# Altium PCB V1.PcbDoc
Units mm, origin at the board's own origin, x right, y up, seen from the top; angles counter-clockwise.
Board outline 50 x 55 mm, 2 copper layers (Top Layer, Bottom Layer); 56 components, 45 nets, 228 pads, 89 vias.
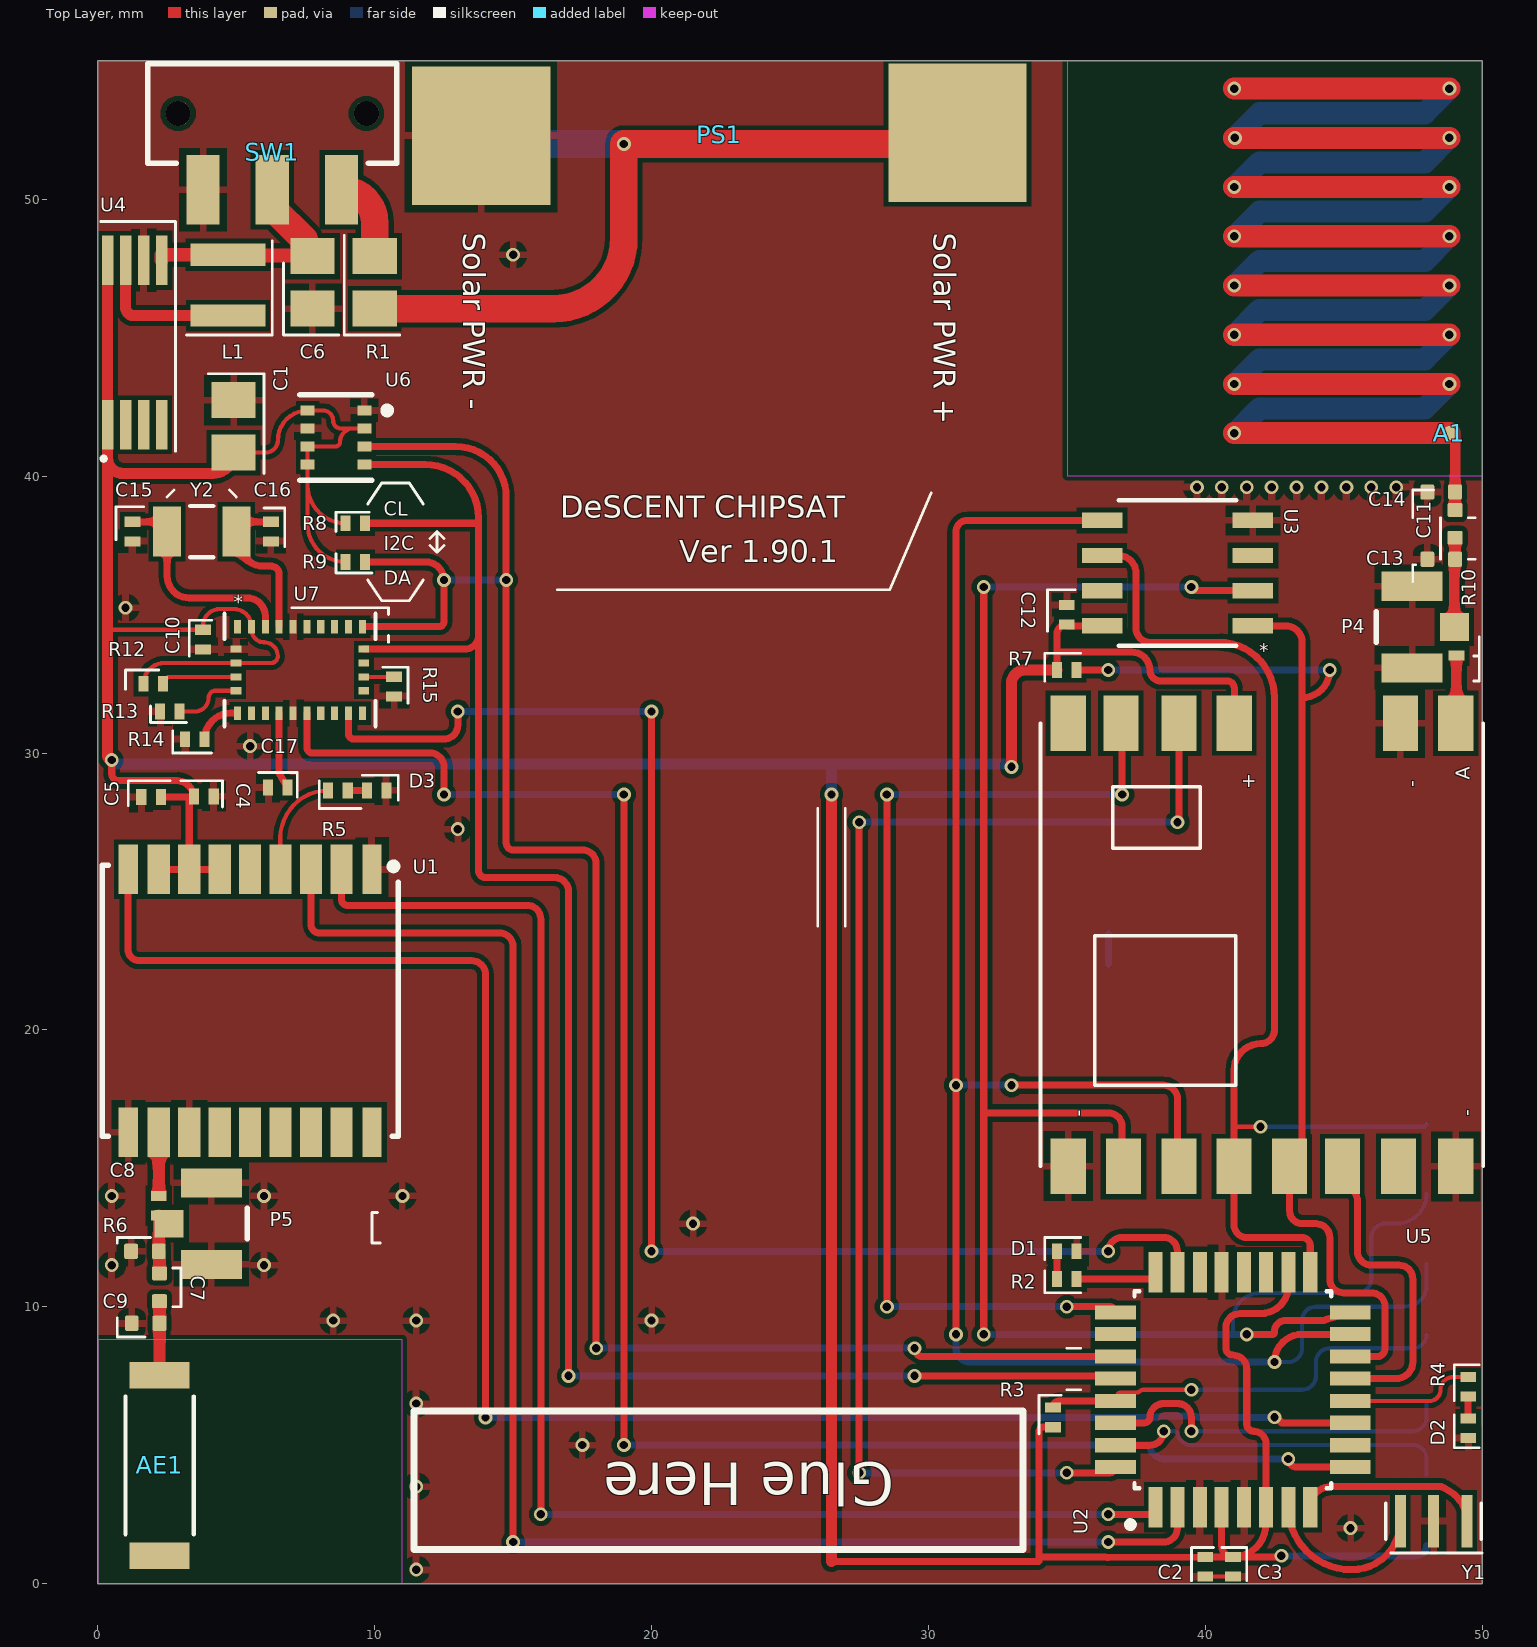
[diagram p0: Top Layer view]
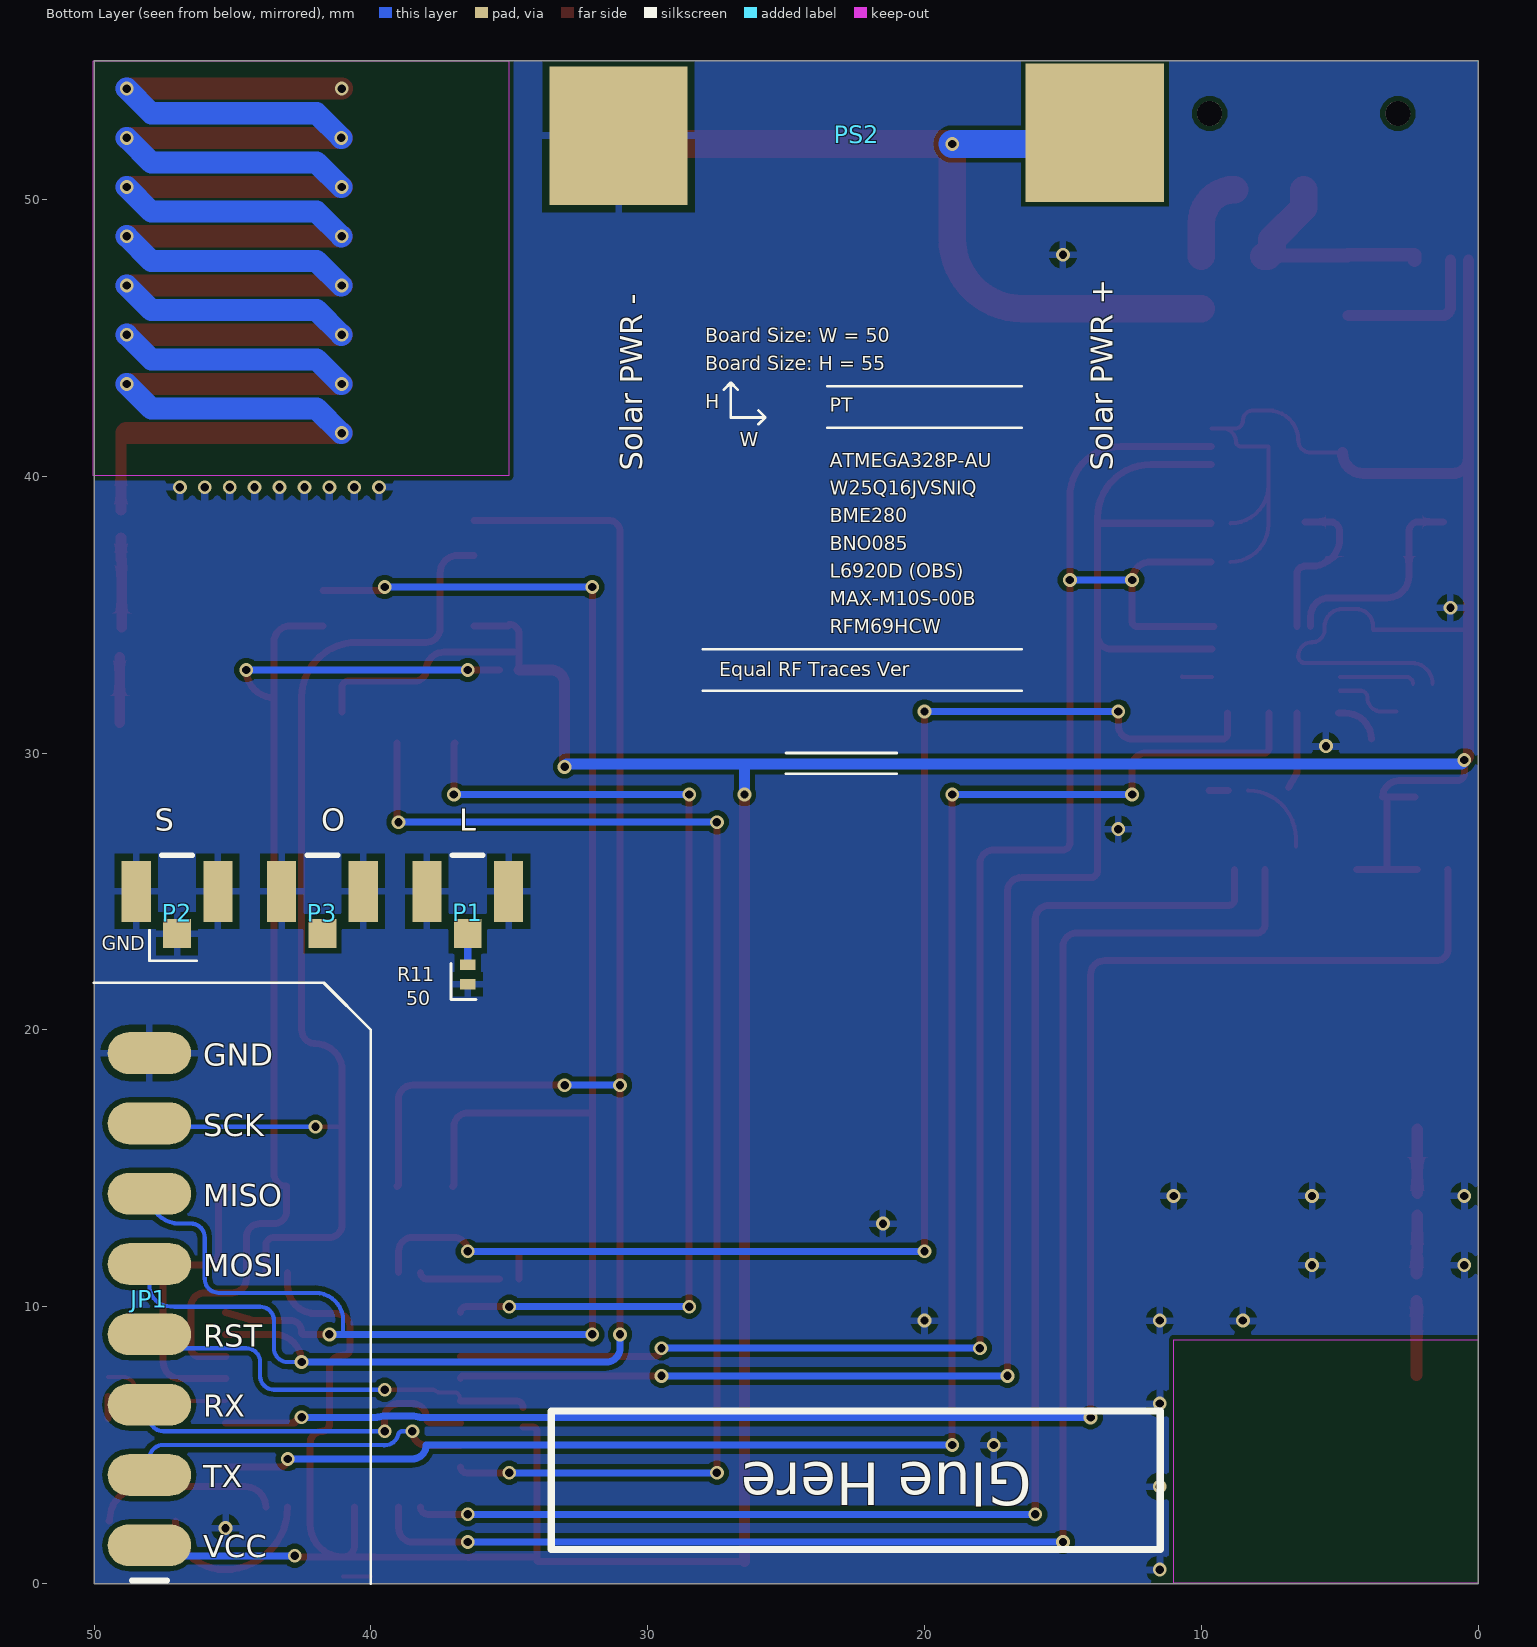
[diagram p1: Bottom Layer view, seen from below]

## Layer stack, top to bottom
Top Solder: solder mask 0.0102, Solder Resist, Dk 3.5
Top Layer: signal copper 0.0356
Dielectric 1: dielectric 0.32, FR-4, Dk 4.8
Bottom Layer: signal copper 0.0356
Bottom Solder: solder mask 0.0102, Solder Resist, Dk 3.5

## Board outline
0,0 50,0 50,55 0,55

## Design rules (kind name [scope] priority, off if disabled: settings)
Clearance [All] p1: gap=0.18 ignorepadtopadclearanceinfootprint=FALSE
PolygonConnect [All] p1: connectstyle=Relief reliefconductorwidth=0.254 reliefentries=4 polygonreliefangle="90 Angle" airgapwidth=0.254
RoutingVias [All] p1: holewidth=0.711 width=1.27 viastyle="Through Hole" minholewidth=0.711 minwidth=1.27 maxholewidth=0.711 maxwidth=1.27
SolderMaskExpansion [All] p1: expansion=0.102 istentingtop=FALSE
SupplyNets "Schematic Supply Nets_2" [InNet('VCC')] p1: voltage=0.000
SupplyNets "Schematic Supply Nets_1" [InNet('GND')] p2: voltage=0.000
SupplyNets "Schematic Supply Nets" [InNet('VIN')] p3: voltage=0.000
Width [All] p1: maxlimit=1 minlimit=0.1 preferedwidth=0.254
30 further rules are at their usual default settings.

## Components (designator, comment, footprint, x,y, rotation, side; value= is the part's Value field where it differs from the comment)
A1 "helical_antenna_shorter_1_loop" LoRa_ANT_915_shorter_1_loop 53.899,40.157 r0 top
AE1 "1575AT43A0040E" ANT_1575AT_JOT-L 1.727,4.166 r90 top
C1 "47uF" RCL_M0805 4.9,41.8 r90 top
C2 "10uF" 0402 40,0.604 r270 top
C3 "100nF" 0402 41,0.604 r270 top
C4 "0.1uF" 0402 3.831,28.433 r0 top
C5 "0.1uF" 0402 1.921,28.405 r180 top
C6 "47uF" RCL_M0805 7.75,47 r90 top
C7 "C0402C223K8PACTU" PI_NET_CAPACITOR_0402NO_EXPANSION 2.225,10.7 r90 top value="22,000 pF"
C8 "C0402C223K8PACTU" PI_NET_CAPACITOR_0402NO_EXPANSION 1.7,12 r0 top value="22,000 pF"
C9 "C0402C223K8PACTU" PI_NET_CAPACITOR_0402NO_EXPANSION 1.725,9.4 r0 top value="22,000 pF"
C10 "100nF" 0402 3.8,34.1 r270 top
C11 "C0402C223K8PACTU" PI_NET_CAPACITOR_0402NO_EXPANSION 49.025,38.275 r270 top value="22,000 pF"
C12 "100nF" 0402 35,35 r90 top
C13 "C0402C223K8PACTU" PI_NET_CAPACITOR_0402NO_EXPANSION 48.525,37 r180 top value="22,000 pF"
C14 "C0402C223K8PACTU" PI_NET_CAPACITOR_0402NO_EXPANSION 48.525,39.425 r0 top value="22,000 pF"
C15 "22pF" 0402 1.25,38 r270 top
C16 "22pF" 0402 6.25,38 r270 top
C17 "0.1uF" 0402 6.5,28.75 r180 top
D1 "LEDCHIP-LED0805" 0402 35,12 r0 top
D2 "LEDCHIP-LED0805" 0402 49.5,5.604 r270 top
D3 "LEDCHIP-LED0805" 0402 10.071,28.648 r0 top
JP1 "FTDI" 1X08_OVAL 48,7.73 r90 bottom
L1 "10uH" Inductor_For_6920 4.7,46.9 r90 top
P1 "U.FL-R-SMT-1(01)" HRS-U.FL-R-SMT-3_V 36.5,25 r180 bottom
P2 "U.FL-R-SMT-1(01)" HRS-U.FL-R-SMT-3_V 47,25 r180 bottom
P3 "U.FL-R-SMT-1(01)" HRS-U.FL-R-SMT-3_V 41.75,25 r180 bottom
P4 "U.FL-R-SMT-1(01)" HRS-U.FL-R-SMT-3_V 47.475,34.55 r90 top
P5 "U.FL-R-SMT-1(01)" HRS-U.FL-R-SMT-3_V 4.1,13 r270 top
PS1 "ALTA_CELL" ALTA_CELL_SAME_SIZED_FEET 22.45,52.35 r90 top
PS2 "ALTA_CELL" ALTA_CELL_SAME_SIZED_FEET 22.45,52.35 r90 bottom
R1 "0 ohm" RCL_M0805 10,47 r90 top
R2 "1k6" 0402 35,11 r0 top
R3 "10k" 0402 34.5,6 r270 top
R4 "1k6" 0402 49.5,7.104 r90 top
R5 "1k" 0402 8.671,28.648 r0 top
R6 "1k" 0402 2.2,13.646 r270 top
R7 "1k6" 0402 35,33 r0 top
R8 "2.2k" 0402 9.3,38.3 r180 top
R9 "2.2k" 0402 9.3,36.9 r180 top
R10 "1k" 0402 49.075,33.875 r90 top
R11 "50" 0402 36.5,22 r270 bottom
R12 "10k" 0402 2,32.5 r180 top
R13 "10k" 0402 2.6,31.5 r180 top
R14 "10k" 0402 3.5,30.5 r180 top
R15 "10k" 0402 10.7,32.4 r270 top
SW1 "JS102011SAQN" FP-JS102011SAQN-MFG 6.3,53.1 r180 top
U1 "MAX-M10S-00B" "FP-MAX-M10S-00B-MFG - duplicate" 5.5,21.05 r270 top
U2 "ATMEL-ATMEGA328P-AU_ATMEGA328P-AU" ATMEL-ATMEGA328P-AU_QFP80P900X900X120-32N 41,7 r90 top
U3 "W25Q16JVSNIQ" SOIC_150MIL_WIN 39,36.5 r180 top
U4 "L6920" L6920_L6920 1.325,44.83 r0 top
U5 "RFM95" _C2H_RFM95 42.05,25.298 r90 top
U6 "d58e2f6669bc67e6a2bc6a28610ca79" FP-BME280-MFG 8.6,41.4 r0 top
U7 "BN0085" QFN28_BNO086_CEV 7.3,33 r0 top
Y1 "CSTNE16M0V530000R0" OSC_CSTNE16M0V530000R0 48.25,2.25 r0 top
Y2 "9HT10-32.768KBZF-T" XTAL_9HT10_TXC 3.751,38 r180 top

## Footprints (in the part's own frame and the unit in brackets; to place one, negate y for a bottom-side part, rotate by r counter-clockwise, add the part's x,y. Pads: shape width x height; smd on the part's side, far side on the other; paste and mask are expansions set on the pad)
1X08_OVAL [mm]
  oval 1.508x3.016 smd: 1(-6.35,0) 2(-3.81,0) 3(-1.27,0) 4(1.27,0) 5(3.81,0) 6(6.35,0) 7(8.89,0) 8(11.43,0)
  silkscreen extent -7.62,-0.63 -7.62,0.64
0402 [mm]
  rect 0.365x0.572 smd paste+0 mask+0: 1(-0.354,0) 2(0.354,0)
_C2H_RFM95 [mm]
  rect 2x1.27 smd: ANT(5.777,-7) DIO0(5.777,3) DIO1(5.78,5.095) DIO2(5.78,7) DIO5(-10.225,-4.936) GND(5.777,-5) GND1(-10.222,7) GND2(-10.23,-7) MISO(-10.23,5) MOSI(-10.225,3) NSS(-10.222,-1) RST(-10.222,-2.905) SCK(-10.23,1.012) VDD(5.777,1)
  silkscreen extent -10.23,-8 5.78,8
ALTA_CELL_SAME_SIZED_FEET [mm] "SAME SIZED FEET AND CORRECT POLARITY"
  rect 5x5 smd: +(0.056,-8.603) -(-0.055,8.603)
  silkscreen extent -51.12,-10.97 -46.12,11.03
ANT_1575AT_JOT-L [mm]
  rect 0.963x2.16 smd paste+0 mask+0: 1(3.363,-0.5) 2(-3.163,-0.5)
  Keep-Out Layer region: 4.637,-9.263 4.637,1.737 -4.163,1.737 -4.163,-9.263
  silkscreen extent -2.39,-1.73 2.59,0.73
ATMEL-ATMEGA328P-AU_QFP80P900X900X120-32N [mil]
  rect 58x20 smd: 1(-167,110) 2(-167,79) 3(-167,47) 4(-167,16) 5(-167,-16) 6(-167,-47) 7(-167,-79) 8(-167,-110) 17(167,-110) 18(167,-79) 19(167,-47) 20(167,-16) 21(167,16) 22(167,47) 23(167,79) 24(167,110)
  rect 20x58 smd: 9(-110,-167) 10(-79,-167) 11(-47,-167) 12(-16,-167) 13(16,-167) 14(47,-167) 15(79,-167) 16(110,-167) 25(110,167) 26(79,167) 27(47,167) 28(16,167) 29(-16,167) 30(-47,167) 31(-79,167) 32(-110,167)
  silkscreen extent -196,-140 140,150
FP-BME280-MFG [mm]
  rect 0.5x0.35 smd paste+0 mask+0: 1(1.025,0.975) 2(1.025,0.325) 3(1.025,-0.325) 4(1.025,-0.975) 5(-1.025,-0.975) 6(-1.025,-0.325) 7(-1.025,0.325) 8(-1.025,0.975)
  silkscreen extent -1.3,-1.55 1.97,1.55
FP-JS102011SAQN-MFG [mm]
  rect 1.2x2.5 smd paste+0 mask+0: 1(-2.5,2.75) 2(0,2.75) 3(2.5,2.75)
  round 0.9 hole 0.9 unplated paste-2539.97 mask+0: ""(-3.4,0) ""(3.4,0)
  silkscreen extent -4.5,-1.8 4.5,1.8
"FP-MAX-M10S-00B-MFG - duplicate" [mm]
  rect 1.8x0.7 smd paste-1000 mask+0: 1(-4.75,4.4) 9(-4.75,-4.4) 10(4.75,-4.4) 18(4.75,4.4)
  rect 1.8x0.8 smd paste-1000 mask+0: 2(-4.75,3.3) 3(-4.75,2.2) 4(-4.75,1.1) 5(-4.75,0) 6(-4.75,-1.1) 7(-4.75,-2.2) 8(-4.75,-3.3) 11(4.75,-3.3) 12(4.75,-2.2) 13(4.75,-1.1) 14(4.75,0) 15(4.75,1.1) 16(4.75,2.2) 17(4.75,3.3)
  silkscreen extent -4.98,-5.35 4.9,5.35
HRS-U.FL-R-SMT-3_V [mm] "SMT, 3-Leads, Body 2.6x2.6mm"
  rect 1.05x2.2 smd: 1(-1.475,0) 2(1.475,0)
  rect 1x1.05 smd: 3(0,-1.525)
  silkscreen extent -0.55,1.3 0.55,1.3
Inductor_For_6920 [mil] "Inductor for L6920"
  rect 31.5x106.3 smd: 1(-43.31,0) 2(43.31,0)
L6920_L6920 [mm]
  rect 0.42x1.78 smd: 1(-0.975,-2.97) 2(-0.325,-2.97) 3(0.325,-2.97) 4(0.975,-2.97) 5(0.975,2.97) 6(0.325,2.97) 7(-0.325,2.97) 8(-0.975,2.97)
  silkscreen extent -1.19,-4.27 -1.05,-4.13
LoRa_ANT_915_shorter_1_loop [mil]
  round 20 smd paste-99999 mask+0: ANT(-200,55)
  Top Layer lines w31.5: -505.87,55 -200,55 ; -505.87,125 -200,125 ; -505.87,195 -200,195 ; -505.87,265 -200,265 ; -505.87,335 -200,335 ; -505.87,405 -200,405 ; -505.87,475 -200,475 ; -505.87,545 -200,545
  Bottom Layer lines w10: -505.43,55 -505,55 ; -505.43,125 -505,125 ; -505.43,195 -505,195 ; -505.43,265 -505,265 ; -505.43,335 -505,335 ; -505.43,405 -505,405 ; -505.43,475 -505,475 ; -505.43,545 -505,545
  Bottom Layer lines w31.5: -505,55 -470,90 -235,90 -200,125 ; -505,125 -470,160 -235,160 -200,195 ; -505,195 -470,230 -235,230 -200,265 ; -505,265 -470,300 -235,300 -200,335 ; -505,335 -470,370 -235,370 -200,405 ; -505,405 -470,440 -235,440 -200,475 ; -505,475 -470,510 -235,510 -200,545
  Keep-Out Layer region: -743.11,-5.55 -152.56,-5.55 -152.56,585 -743.11,585
OSC_CSTNE16M0V530000R0 [mm]
  rect 0.4x1.9 smd: 1(-1.2,0) 2(0,0) 3(1.2,0)
  silkscreen extent -1.72,-0.65 1.72,0.65
PI_NET_CAPACITOR_0402NO_EXPANSION [mm] "Chip Capacitor, Body 1.0x0.5mm, Height 0.6mm, NO SILK"
  rrect25% 0.5x0.55 smd mask+0: 1(-0.5,0) 2(0.5,0)
QFN28_BNO086_CEV [mil]
  rect 10x19 smd paste+0 mask+0: 1(-88.58,61.5) 6(-88.58,-61.5) 7(-68.9,-61.5) 8(-49.21,-61.5) 9(-29.53,-61.5) 10(-9.84,-61.5) 11(9.84,-61.5) 12(29.53,-61.5) 13(49.21,-61.5) 14(68.9,-61.5) 15(88.58,-61.5) 20(88.58,61.5) 21(68.9,61.5) 22(49.21,61.5) 23(29.53,61.5) 24(9.84,61.5) 25(-9.84,61.5) 26(-29.53,61.5) 27(-49.21,61.5) 28(-68.9,61.5)
  rect 15x10 smd paste+0 mask+0: 2(-91,29.53) 3(-91,9.84) 4(-91,-9.84) 5(-91,-29.53) 16(91,-29.53) 17(91,-9.84) 18(91,9.84) 19(91,29.53)
  silkscreen extent -108,-80 108,80
RCL_M0805 [mm] "Capacitor 0805 for L6920"
  rect 1.3x1.6 smd: 1(-0.95,0) 2(0.95,0)
SOIC_150MIL_WIN [mil]
  rect 57.5x22 smd paste+0 mask+0: 1(-107.25,75) 2(-107.25,25) 3(-107.25,-25) 4(-107.25,-75) 5(107.25,-75) 6(107.25,-25) 7(107.25,25) 8(107.25,75)
  silkscreen extent -84,-104 84,104
XTAL_9HT10_TXC [mil]
  rect 39.5x71 smd paste+0 mask+0: 1(-49.25,0) 2(49.25,0)
  silkscreen extent -16,-36 16,36

## Part data
A1: "helical_antenna schematic for the DeSCENT v1 ChipSat"
AE1: "No Description Available", Mfr_Name="Johanson Technology", Digi-Key_Part_Number_1=712-1003-2-ND, Digi-Key_Part_Number_2=712-1003-1-ND, Digi-Key_Part_Number_3=712-1003-6-ND
C1 C6: library part C-EUC0603K_1, "CAPACITOR, European symbol", DeviceName=C0805K, DeviceSetName=C-EU, GateName_1=G$1, LibraryName=rcl, SymbolName_1=C-EU
C2 C3 C4 C5 C15 C16 C17: library part C-EUC0805K, "CAPACITOR, European symbol", DeviceName=C0805K, DeviceSetName=C-EU, GateName_1=G$1, LibraryName=rcl, SymbolName_1=C-EU
C7 C8 C9 C11 C13 C14: library part 0402RFCapacitor_NO_SILK, "CAP CER 0.022UF 10V X5R 0402", Capacitance="22,000 pF", Manufacturer=Kemet, Package=C0402-BB, Temperature="-55°C to +125°C", Temperature Characteristic=X5R, Temperature Coefficient=15%, Temperature Range High=+125°C, Temperature Range Low=-55°C, Tolerance=0.1, Voltage Rating="10 V", Automotive=No, Category=Cap, ComponentLink2Description=Datasheet, ComponentLink2URL=https://content.kemet.com/datasheets/KEM_C1002_X7R_SMD.pdf, Device Class L1="Passive Components", Device Class L2=Capacitors, Device Class L3="Ceramic Capacitors", Digikey Description="CAP CER 0.022UF 10V X5R 0402", Height=0.55mm, Ipc Land Pattern Name=CAPC10050X50, Lead Free=Yes, Manufacturer Part Number=C0402C223K8PACTU, Material=Ceramic, Mouser Description="Multilayer Ceramic Capacitors MLCC - SMD/SMT 10volts 22000pF X5R 10%", Octopart=https://octopart.com/c0402c223k8pactu-kemet-140074, RoHS=TRUE
C10 C12: library part RCL_C-EUC0805, Package=RCL_C0805, DeviceName=C0805, DeviceSetName=RCL_C-EU, GateName_1=G$1, LibraryName=AmbaSat-1v1-01-NO-solar, SymbolName_1=RCL_C-EU
D1 D2 D3: "LED   OSRAM: - CHIPLED LG R971, LG N971, LY N971, LG Q971, LY Q971, LO R971, LY R971 LH N974, LH R974 LS Q976, LO Q976, LY Q976 LO Q996 - Hyper CHIPLED LW Q18S LB Q993, LB Q99A, LB R99A - SideLED LS A670, LO A670, LY A670, LG A670, LP A670 LB A673, LV A673, LT A673, LW A673 LH A674 LY A675 LS A676, LA A676, LO A676, LY A676, LW A676 LS A679, LY A679, LG A679 -  Hyper Micro SIDELEDÂ® LS Y876, LA Y876, LO Y876, LY Y876 LT Y87S - SmartLED LW L88C, LW L88S LB L89C, LB L89S, LG L890 LS L89K, LO L89K, LY L89K LS L896, LA L896, LO L896, LY L896 - TOPLED LS T670, LO T670, LY T670, LG T670, LP T670 LSG T670, LSP T670, LSY T670, LOP T670, LYG T670 LG T671, LOG T671, LSG T671 LB T673, LV T673, LT T673, LW T673 LH T674 LS T676, LA T676, LO T676, LY T676, LB T676, LH T676, LSB T676, LW T676 LB T67C, LV T67C, LT T67C, LS T67K, LO T67K, LY T67K, LW E67C LS E67B, LA E67B, LO E67B, LY E67B, LB E67C, LV E67C, LT E67C LW T67C LS T679, LY T679, LG T679 LS T770, LO T770, LY T770, LG T770, LP T770 LB T773, LV T773, LT T773, LW T773 LH T774 LS E675, LA E675, LY E675, LS T675 LS T776, LA T776, LO T776, LY T776, LB T776 LHGB T686 LT T68C, LB T68C - Hyper Mini TOPLEDÂ® LB M676 - Mini TOPLED SantanaÂ® LG M470 LS M47K, LO M47K, LY M47K    Source: http://www.osram.convergy.de   LUXEON: - LUMILEDÂ® LXK2-PW12-R00, LXK2-PW12-S00, LXK2-PW14-U00, LXK2-PW14-V00 LXK2-PM12-R00, LXK2-PM12-S00, LXK2-PM14-U00 LXK2-PE12-Q00, LXK2-PE12-R00, LXK2-PE12-S00, LXK2-PE14-T00, LXK2-PE14-U00 LXK2-PB12-K00, LXK2-PB12-L00, LXK2-PB12-M00, LXK2-PB14-N00, LXK2-PB14-P00, LXK2-PB14-Q00 LXK2-PR12-L00, LXK2-PR12-M00, LXK2-PR14-Q00, LXK2-PR14-R00 LXK2-PD12-Q00, LXK2-PD12-R00, LXK2-PD12-S00 LXK2-PH12-R00, LXK2-PH12-S00 LXK2-PL12-P00, LXK2-PL12-Q00, LXK2-PL12-R00    Source: www.luxeon.com   KINGBRIGHT:   KA-3528ASYC Source: www.kingbright.com", DeviceName=CHIP-LED0805, DeviceSetName=LED, GateName_1=G$1, LibraryName=led, SymbolName_1=LED
JP1: library part CONN_06LONGPADS, "Multi connection point. Often used as Generic Header-pin footprint for 0.1 inch spaced/style header connections    On any of the 0.1 inch spaced packages, you can populate with these:  Break Away Headers - Straight (PRT-00116)   Break Away Male Headers - Right Angle (PRT-00553)   Female Headers (PRT-00115)   Break Away Headers - Machine Pin (PRT-00117)   Break Away Female Headers - Swiss Machine Pin (PRT-00743)   Arduino Stackable Header - 6 Pin (PRT-09280)        For SCREWTERMINALS and SPRING TERMINALS visit here:  Screw Terimnals on SparkFun.com (5mm/3.5mm/2.54mm spacing)       This device is also useful as a general connection point to wire up your design to another part of your project. Our various solder wires solder well into these plated through hole pads.  Hook-Up Wire - Assortment (Stranded, 22 AWG) (PRT-11375)   Hook-Up Wire - Assortment (Solid Core, 22 AWG) (PRT-11367)   View the entire wire category on our website here", DeviceName=LONGPADS, DeviceSetName=CONN_06, GateName_1=G$1, LibraryName=SparkFun-Connectors, SymbolName_1=CONN_06
L1: library part ASPI-0315FS, DeviceSetName=ASPI-0315FS, GateName_1=G$1, LibraryName=ASPI-0315FS, SymbolName_1=ASPI-0315FS
P1 P2 P3 P4 P5: library part CN-1P-M-R3, "Ultra Small Coaxial Connector, 6 GHz, -40 to 90 degC, 3-Pin SMD, RoHS, Bulk", Dielectric Material=LiquidCrystalPolymer(LCP), Frequency - Max=6GHz, Housing Color=Silver, Manufacturer="Hirose Electric", Operating Temperature=-40degC~90degC, Package Description="3-Pin Surface Mount Device, Body 2.6 x 2.6 mm", Package Reference=U.FL-R-SMT, Standard Package=100, Body Finish=Silver, Body Material=PhosphorBronze, Category=Connectors,Interconnects, Center Contact Material=PhosphorBronze, Center Contact Plating=Gold, Connector Style=U.FL, Connector Type=Jack,MalePin, Contact Termination=Solder, Datasheet URL=https://datasheet.ciiva.com/26945/getdatasheetpartid-475239-26945414.pdf, Datasheet Version=Feb-09, Dynamic Catalog=U.FLSeries, Family=CoaxialConnectors(RF), Fastening Type=Snap-On, Featured Product=HiroseU.FLSeries, Impedance=50Ohm, Manufacturer URL=https://www.hirose.com, Minimum Quantity=UltraMiniatureCoaxial, Mounting Type=SurfaceMount, Online Catalog=U.FLSeries, Other Names="H122041 / U.FL-R-SMT-1(01)-ND", Packaging=Bulk, Quantity Available=Bulk, Series=U.FL, Shield Termination=Solder, Unit PriceUSD=U.FL
R1: library part R-EU_M0805, "Larger Resistor for Solar", DeviceName=M0805, DeviceSetName=R-EU_, GateName_1=G$1, LibraryName=rcl, SymbolName_1=R-EU
R2 R3 R4 R5 R6 R7 R8 R9 R10 R11 R12 R13 R14 R15: library part R-EU_M0805, "RESISTOR, European symbol", DeviceName=M0805, DeviceSetName=R-EU_, GateName_1=G$1, LibraryName=rcl, SymbolName_1=R-EU
SW1: library part CMP-2000-06501-2, "SWITCH SLIDE SPDT 300MA 6V", Case/Package=100, Contact Current Rating=300mA, Contact Resistance=70mR, Max Operating Temperature=85°C, Max Voltage Rating (DC)=6V, Min Operating Temperature=-40°C, Package Quantity=1, Actuator Length=2mm, Actuator Material=Nylon, Actuator Type=Standard, Contact Material="Copper Alloy", Contact Plating=Silver, Current Rating=300mA, Electrical Life=5000Cycles, Housing Material=Nylon, Illumination Type=Non-Illuminated, Lead Free="Lead Free", Length=9mm, Max Current Rating=300mA, Mount="Surface Mount", Orientation="Right Angle", Packaging="Tape and Reel", Radiation Hardening=No, REACH SVHC="No SVHC", Switch Function=On-On, Switch Travel=2mm, Termination="Gull Wing", Throw Configuration=SPDT, Voltage Rating (DC)=6V
U1: library part CMP-207130-000026-1, "GNSS LCC RX, ROM, TCXO, LNA, SAW"
U2: MPN=ATMEGA328P-AU, Package=ATMEL-ATMEGA328P-AU_QFP80P900X900X120-32N, DeviceSetName=ATMEL-ATMEGA328P-AU_ATMEGA328P-AU, GateName_1=A, LibraryName=AmbaSat-1v1-01-NO-solar, OC_FARNELL=1715486, OC_NEWARK=14R4631, SUPPLIER=Atmel, SymbolName_1=ATMEL-ATMEGA328P-AU_ATMEGA328P-AU
U3: "NOR Flash", Mfr_Name=Winbond, RefDes=RefDes, Type=Type
U4: "Voltage stepper upper L6920DTR model", DeviceSetName=L6920, GateName_1=G$1, LibraryName=L6920, SymbolName_1=L6920
U5: "LoRa chip", DeviceSetName=RFM95, GateName_1=G$1, LibraryName=_c2h, RFM92/95/96/98=RFM92/95/96/98, SymbolName_1=RFM95
U6: "Temp and huminity sensor"
U7: library part BNO086, "No Description Available", Mfr_Name=CEVA, RefDes=RefDes, Type="Motion Sensors"
Y1: "16MHz Ceramic Resonator Built in Capacitor 15pF Â±0.15% 40 Ohms -40Â°C ~ 125Â°C Surface Mount", Package=None, Availability=Unavailable, MF="{'manufacturer': u'Murata Electronics'}", MP=CSTNE16M0V530000R0, Price=None
Y2: "32.768 kHz Â±50ppm Crystal 12.5pF 70 kOhms 2-SMD, No Lead", Package="SMD-2 TXC Corporation", Check_prices=https://www.snapeda.com/parts/9HT10-32.768KBZF-T/TXC/view-part/?ref=eda, ComponentLink1Description="New link", MF=TXC, MP=9HT10-32.768KBZF-T, SnapEDA_Link=https://www.snapeda.com/parts/9HT10-32.768KBZF-T/TXC/view-part/?ref=snap
PS1 PS2: DeviceSetName=ALTA_CELL, GateName_1=G$1, LibraryName=ALTA_CELL, SymbolName_1=ALTA_CELL

## Via types
v1: diameter 0.5, hole 0.3, Top Layer to Bottom Layer, tented both sides, 55 vias
v2: diameter 0.5, hole 0.3, Top Layer to Bottom Layer, 34 vias

## Nets (pads, with @x,y where several pads share a name; then routed paths per layer and width w, separated by ;. In a path a pad name is that pad's centre, name@x,y a point inside that pad or via, vN(x,y) a via of type N, cw(c..) or ccw(c..) an arc to the next point about the centre after c; other vN are vias at no path point)
DIO0: U2.32 U5.DIO0 | length 47.3
  Top Layer w0.254: v1(27.5,4) v1(27.5,27.5) ; v1(35,4) 36.552,4 ccw(c36.552,4.206) U2.32 ; v1(39,27.5) ccw(c39,27.55) 39.05,27.55 U5.DIO0@39.05,30.352
  Bottom Layer w0.254: v1(27.5,4) v1(35,4) ; v1(27.5,27.5) v1(39,27.5)
DIO1: U2.25 U5.DIO1 | length 37.3
  Top Layer w0.254: v1(28.5,10) v1(28.5,28.5) ; v1(35,10) 36.552,10 cw(c36.552,9.794) U2.25 ; U5.DIO1@36.955,30.355 cw(c36.955,30.31) 37,30.31 v1(37,28.5)
  Bottom Layer w0.254: v1(28.5,10) v1(35,10) ; v1(28.5,28.5) v1(37,28.5)
GND: C1.2 C2.2 C3.2 C4.2 C5.2 C6.1 C8.1 C9.1 C10.2 C12.2 C13.2 C14.1 C15.2 C16.2 C17.2 D1.2 D2.2 D3.2 JP1.8 P1.1 P1.2 P2.1 P2.2 P2.3 P3.1 P3.2 P4.1 P4.2 P5.1 P5.2 PS1.- PS2.- R11.2 R13.2 R14.2 R15.2 SW1.3 U1.1 U1.10 U1.12 U2.3 U2.5 U2.21 U3.4 U4.6 U5.GND U5.GND1 U5.GND2 U6.1 U6.7 U7.2 U7.10 U7.25 Y1.2 | length 1
  Top Layer w0.15: C2.2 C3.2
  other v1: 45.25,2 17.5,5 20,9.5 21.5,13 13,27.25 5.5,30.25 1,35.25 15,48
  other v2: 11.5,0.5 11.5,3.5 11.5,6.5 8.5,9.5 11.5,9.5 0.5,11.5 6,11.5 0.5,14 6,14 11,14 39.7,39.6 40.6,39.6 41.5,39.6 42.4,39.6 43.3,39.6 44.2,39.6 45.1,39.6 46,39.6 46.9,39.6
GPS_ANT: AE1.1 C7.1 C9.2 | length 2.7
  Top Layer w0.43: C7.1 C9.2 2.227,9.4 AE1.1
GPS_ANT_Tuning: C7.2 C8.2 P5.3 R6.2 | length 2.1
  Top Layer w0.43: R6.2 C8.2 cw(c2.2,11.975) 2.225,11.975 C7.2
GPS_RESET: U1.9 U2.11 | length 63.7
  Top Layer w0.254: U1.9 1.086,25.8 1.086,22.914 ccw(c1.5,22.914) 1.5,22.5 13.5,22.5 cw(c13.5,22) 14,22 v1(14,6) ; v1(42.5,6.005) 42.567,6.005 42.765,5.806 U2.11
  Bottom Layer w0.254: v1(14,6) 38,6 38,6.005 38.215,6.005 ccw(c38.214,6.259) 38.303,6.021 cw(c38.5,5.5) 38.5,6.057 39.5,6.057 cw(c39.5,5.5) 39.697,6.021 ccw(c39.786,6.259) 39.785,6.005 v1(42.5,6.005)
GPS_RX: U1.2 U2.1 | length 52.6
  Top Layer w0.254: U1.2 8.8,24.7 ccw(c9,24.7) 9,24.5 15.5,24.5 cw(c15.5,24) 16,24 v1(16,2.5) ; v1(36.5,2.5) 37.948,2.5 ccw(c37.948,2.758) U2.1
  Bottom Layer w0.254: v1(16,2.5) v1(36.5,2.5)
GPS_TX: U1.3 U2.2 | length 56.3
  Top Layer w0.254: U1.3 7.7,23.8 ccw(c8,23.8) 8,23.5 14.5,23.5 cw(c14.5,23) 15,23 v1(15,1.5) ; v1(36.5,1.5) 38.5,1.5 ccw(c38.5,1.993) 38.993,1.993 U2.2
  Bottom Layer w0.254: v1(15,1.5) v1(36.5,1.5)
IMU_INTN: U2.23 U7.14 | length 52.4
  Top Layer w0.254: U7.14 9.05,30.7 ccw(c9.25,30.7) 9.25,30.5 12.5,30.5 ccw(c12.5,31) 13,31 v1(13,31.5) ; v1(20,12) v1(20,31.5) ; v1(36.5,12) cw(c37,12) 37,12.5 38.5,12.5 cw(c38.5,12.007) 38.993,12.007 U2.23
  Bottom Layer w0.254: v1(13,31.5) v1(20,31.5) ; v1(20,12) v1(36.5,12)
IMU_RESET: U2.9 U7.11 | length 64.3
  Top Layer w0.254: U7.11 7.55,30.2 ccw(c7.75,30.2) 7.75,30 12,30 cw(c12,29.5) 12.5,29.5 v1(12.5,28.5) ; v1(19,5) v1(19,28.5) ; v1(43,4.5) ccw(c43.294,4.5) 43.294,4.206 U2.9
  Bottom Layer w0.254: v1(12.5,28.5) v1(19,28.5) ; v1(19,5) 38,5 ccw(c38.5,5) 38.5,4.5 v1(43,4.5)
LoRa_ANT: A1.ANT C11.1 C14.2 | length 2.8
  Top Layer w0.381: C11.1 C14.2 A1.ANT@49.025,41.548
  other v2: 41.05,41.554 41.05,43.332 48.819,43.332 41.05,45.11 48.819,45.11 41.05,46.888 48.819,46.888 41.05,48.666 48.819,48.666 41.05,50.444 48.819,50.444 41.072,52.222 48.819,52.222 41.05,54 48.819,54
LoRa_ANT_Tuning: C11.2 C13.1 P4.3 R10.2 | length 3.2
  Top Layer w0.381: P4.3 49,36.975 cw(c49.025,36.975) C13.1 C11.2
LoRa_RESET: U2.13 U5.RST | length 10.8
  Top Layer w0.254: U5.RST@44.955,14.353 cw(c44.955,13.808) 45.5,13.808 45.5,12 ccw(c46,12) 46,11.5 47,11.5 cw(c47,11) 47.5,11 47.5,8 cw(c46.906,8) 46.906,7.406 U2.13
MISO: JP1.6 U2.16 U3.2 U5.MISO | length 68.6
  Top Layer w0.254: v1(32,9) 32,17 ; v1(32,36) 32,17 ; U5.MISO@37.05,14.345 cw(c37.05,14.395) 37,14.395 37,16.5 ccw(c36.5,16.5) 36.5,17 32,17 ; v1(39.5,36) ccw(c39.635,36) 39.635,35.865 U3.2 ; v1(41.5,9) 42.404,9 ccw(c42.403,9.254) 42.486,9.014 ccw(c42.246,9.097) 42.5,9.097 cw(c42.903,9.097) 42.903,9.5 44.239,9.5 ccw(c44.238,9.754) 44.359,9.53 cw(c44.505,9.261) 44.421,9.556 44.804,9.667 U2.16
  Bottom Layer w0.15: 41,9 41,9.5 cw(c42,9.5) 42,10.5 45.5,10.5 ccw(c45.5,11) 46,11 46,12.5 cw(c46.5,12.5) 46.5,13 46.92,13 ccw(c46.92,14.08) JP1.6
  Bottom Layer w0.254: v1(32,9) 41,9 v1(41.5,9) ; v1(32,36) v1(39.5,36)
MOSI: JP1.5 U2.15 U3.5 U5.MOSI | length 69.8
  Top Layer w0.254: v1(31,9) v1(31,18) 31,38 cw(c31.405,38) 31.405,38.405 U3.5 ; v1(33,18) 38.5,18 cw(c38.5,17.5) 39,17.5 39,14.4 ccw(c39.05,14.4) U5.MOSI@39.05,14.35 ; v1(42.5,8) cw(c43.5,8) 43.5,9 U2.15@45.242,9
  Bottom Layer w0.15: v1(42.5,8) 43,8 ccw(c43,8.5) 43.5,8.5 43.5,9.5 cw(c44,9.5) 44,10 47.103,10 ccw(c47.102,10.15) 47.12,10.001 cw(c47.246,9) 47.246,10.009 ccw(c47.246,10.763) 48,10.763 JP1.5
  Bottom Layer w0.254: v1(31,9) 31,8.5 ccw(c31.5,8.5) 31.5,8 v1(42.5,8) ; v1(31,18) v1(33,18)
NetC15_1: C15.1 U7.27 Y2.2 | length 7.8
  Top Layer w0.254: C15.1 2.146,38.354 cw(c2.146,38) Y2.2 2.5,36.4 ccw(c3.3,36.4) 3.3,35.6 5.4,35.6 cw(c5.4,34.95) 6.05,34.95 U7.27
NetC16_1: C16.1 U7.26 Y2.1 | length 5.9
  Top Layer w0.254: C16.1 5.355,38.354 ccw(c5.355,38) Y2.1 5.002,37.748 ccw(c6,37.748) 6,36.75 6.25,36.75 cw(c6.25,36.45) 6.55,36.45 U7.26
NetC17_1: C17.1 U7.9 | length 2.8
  Top Layer w0.254: U7.9 6.55,29.334 ccw(c6.804,29.335) 6.588,29.201 cw(c6.329,29.036) 6.594,29.191 6.798,28.845 C17.1
NetD1_1: D1.1 R2.1 | length 1
  Top Layer w0.254: R2.1 D1.1
NetD2_1: D2.1 R4.1 | length 0.8
  Top Layer w0.254: D2.1 R4.1
NetD3_1: D3.1 R5.2 | length 0.7
  Top Layer w0.254: R5.2 D3.1
NetL1_1: L1.1 U4.7 | length 5.6
  Top Layer w0.4: U4.7 1,46.1 ccw(c1.3,46.1) 1.3,45.8 L1.1
NetP1_3: P1.3 R11.1 | length 1.1
  Bottom Layer w0.254: R11.1 P1.3
NetPS1_+: PS1.+ PS2.+ R1.1 | length 31.5
  Top Layer w1: R1.1 16.46,46.05 ccw(c16.46,48.59) 19,48.59 v1(19,52) 30.647,52 ccw(c30.647,52.406) PS1.+
  Bottom Layer w1: PS2.+ ccw(c14.253,52.406) 14.253,52 v1(19,52)
NetR1_2: R1.2 SW1.1 | length 3.1
  Top Layer w1: SW1.1 cw(c8.8,49.15) 10,49.15 R1.2
NetR2_2: R2.2 U2.24 | length 3
  Top Layer w0.254: R2.2 37.964,11 ccw(c37.964,11.242) U2.24
NetR4_2: R4.2 U2.12 | length 4.8
  Top Layer w0.15: U2.12 48.094,6.594 ccw(c48.094,7) 48.5,7 cw(c48.957,7) 48.957,7.457 R4.2
NetR5_1: R5.1 U1.4 | length 3
  Top Layer w0.15: U1.4@6.586,26.619 6.586,26.917 cw(c8.317,26.917) R5.1
NetR12_1: R12.1 U7.4 | length 2.8
  Top Layer w0.15: R12.1 cw(c2.604,32.5) 2.604,32.75 U7.4
NetR13_1: R13.1 U7.5 | length 2.5
  Top Layer w0.15: R13.1 3.5,31.5 ccw(c3.5,32) 4,32 cw(c4.25,32) 4.25,32.25 U7.5
NetR14_1: R14.1 U7.6 | length 1.7
  Top Layer w0.254: R14.1 cw(c4.791,30.5) 4.791,31.438 U7.6
NetR15_1: R15.1 U7.17 | length 1.1
  Top Layer w0.15: U7.17 10.7,32.75 R15.1
NetU2_7: U2.7 Y1.1 | length 6.3
  Top Layer w0.254: U2.7 ccw(c45.265,2.758) 45.265,0.5 45.3,0.5 ccw(c45.3,2.25) Y1.1
NetU2_8: U2.8 Y1.3 | length 6.8
  Top Layer w0.254: U2.8 cw(c44.536,2.758) 44.536,3.5 46.763,3.5 ccw(c46.762,3.754) 46.801,3.503 cw(c46.85,3.2) 46.85,3.507 47.25,3.507 cw(c47.25,3.2) 47.299,3.503 ccw(c47.338,3.754) 47.337,3.5 47.963,3.5 ccw(c47.962,3.754) 48.001,3.503 cw(c48.05,3.2) 48.05,3.507 48.45,3.507 cw(c48.45,3.2) 48.61,3.462 48.842,3.323 cw(c48.2,2.25) 49.377,2.671 Y1.3
PI_NETWORK_GPS: R6.1 U1.11 | length 2.3
  Top Layer w0.43: R6.1@2.2,14.1 U1.11@2.2,16.4
PI_NETWORK_LoRa: R10.1 U5.ANT | length 2.4
  Top Layer w0.254: U5.ANT ccw(c49.05,31.1) U5.ANT@49.075,31.1
  Top Layer w0.381: U5.ANT@49.075,31.1 R10.1@49.075,33.45
RESET: JP1.4 R3.1 U2.29 | length 15.2
  Top Layer w0.15: U2.29 36.8,6.773 cw(c37.165,6.594) 36.84,6.838 cw(c36.959,6.747) 36.959,6.897 37.495,6.897 ccw(c37.495,7.152) 37.665,6.963 cw(c37.764,6.85) 37.763,7 v1(39.5,7)
  Top Layer w0.254: R3.1 cw(c34.74,6.354) 34.74,6.594 U2.29
  Bottom Layer w0.15: v1(39.5,7) 43.5,7 ccw(c43.5,7.5) 44,7.5 44,8 cw(c44.5,8) 44.5,8.5 47.5,8.5 ccw(c47.5,9) JP1.4
RX: JP1.3 U2.30 | length 13.2
  Top Layer w0.254: U2.30 37.806,5.806 ccw(c37.806,6) 38,6 cw(c38.5,6) 38.5,6.5 39,6.5 cw(c39,6) 39.5,6 v1(39.5,5.5)
  Bottom Layer w0.15: v1(39.5,5.5) 47.5,5.5 ccw(c47.5,6) 48,6 JP1.3
SCK: JP1.7 U2.17 U3.6 U5.SCK | length 41.1
  Top Layer w0.15: 41.038,16.441 cw(c41.096,16.441) 41.096,16.5 v1(42,16.5)
  Top Layer w0.254: U3.6 36.865,37.135 cw(c36.865,36.5) 37.5,36.5 37.5,34.5 ccw(c38,34.5) 38,34 40.5,34 cw(c40.5,32) 42.5,32 42.5,20 cw(c42,20) 42,19.5 ccw(c42,18.538) 41.038,18.538 41.038,16.441 41.038,12.962 ccw(c41.5,12.962) 41.5,12.5 43.5,12.5 cw(c43.5,12.206) 43.794,12.206 U2.17
  Bottom Layer w0.15: v1(42,16.5) 47.88,16.5 ccw(c47.88,16.62) JP1.7
SCL: R8.1 U2.28 U6.4 U7.19 | length 67.5
  Top Layer w0.254: U7.19 13.25,33.75 ccw(c13.25,34.25) 13.75,34.25 ; U6.4 11.825,40.425 cw(c11.825,38.5) 13.75,38.5 13.75,38.25 ; R8.1 13.7,38.3 cw(c13.7,38.25) 13.75,38.25 ; v1(17,7.5) 17,25 ccw(c16.5,25) 16.5,25.5 14,25.5 cw(c14,25.75) 13.75,25.75 13.75,34.25 ; v1(29.5,7.5) 36.665,7.5 cw(c36.665,7.406) U2.28 ; 13.75,34.25 13.75,38.25
  Bottom Layer w0.254: v1(17,7.5) v1(29.5,7.5)
SDA: R9.1 U2.27 U6.3 U7.20 | length 68.8
  Top Layer w0.254: U7.20 12.312,34.562 ccw(c12.312,34.75) 12.5,34.75 v1(12.5,36.25) ccw(c11.85,36.25) 11.85,36.9 R9.1 ; U6.3 12.925,41.075 cw(c12.925,39.25) 14.75,39.25 v1(14.75,36.25) 14.75,26.75 ccw(c15,26.75) 15,26.5 17.5,26.5 cw(c17.5,26) 18,26 v1(18,8.5) ; v1(29.5,8.5) ccw(c29.806,8.5) 29.806,8.194 U2.27
  Bottom Layer w0.254: v1(12.5,36.25) v1(14.75,36.25) ; v1(18,8.5) v1(29.5,8.5)
SS: R7.2 U2.14 U3.1 U5.NSS | length 42.6
  Top Layer w0.254: R7.2 v1(36.5,33) ; U3.1 42.905,34.595 cw(c42.905,34) 43.5,34 43.5,32 ; v1(44.5,33) cw(c43.5,33) 43.5,32 ; U2.14 46.194,8.194 ccw(c46.194,8.5) 46.5,8.5 46.5,10 ccw(c46,10) 46,10.5 45,10.5 cw(c45,11) 44.5,11 44.5,12.5 ccw(c44,12.5) 44,13 43.5,13 cw(c43.5,13.45) 43.05,13.45 43.05,14.353 ccw(c43.05,14.803) 43.5,14.803 43.5,32
  Bottom Layer w0.254: v1(36.5,33) v1(44.5,33)
TX: JP1.2 U2.31 | length 12.6
  Top Layer w0.254: U2.31 37.993,4.993 ccw(c37.993,5.5) v1(38.5,5.5)
  Bottom Layer w0.15: v1(38.5,5.5) 38.863,5.5 cw(c38.862,5.35) 39.008,5.385 ccw(c39.5,5.5) 39.5,4.995 ccw(c39.5,5.5) 39.562,4.999 cw(c39.581,4.85) 39.581,5 42.92,5 ccw(c42.919,5.15) 42.937,5.001 cw(c43,4.5) 43.005,5.005 47.5,5.005 cw(c47.5,4.505) 48,4.505 JP1.2
VCC: C1.1 C2.1 C3.1 C4.1 C5.1 C10.1 C12.1 JP1.1 R3.2 R7.1 R8.2 R9.2 R12.2 U1.6 U1.7 U1.8 U2.4 U2.6 U2.18 U3.8 U4.1 U4.8 U5.VDD U6.2 U6.5 U6.6 U6.8 U7.3 U7.28 | length 181.7
  Top Layer w0.15: 0.35,34.5 ccw(c0.396,34.5) 0.396,34.454 C10.1 3.8,34.6 cw(c4.4,34.6) 4.4,35.2 4.912,35.2 cw(c4.912,34.562) U7.28 5.55,34.45 ccw(c6,34.45) 6,34 cw(c6,33.5) 6.5,33.5 cw(c6.25,33.5) 6.25,33.25 U7.3 2.396,33.25 ccw(c2.396,32.5) R12.2 ; C1.1 6.05,40.85 ccw(c6.05,41.3) 6.5,41.3 cw(c7.575,41.3) U6.8 8.125,42.375 cw(c8.125,42) 8.5,42 ccw(c8.775,42) 8.775,41.725 9.225,41.725 ; R9.2 cw(c8.946,38.271) 7.575,38.271 7.575,39.671 ; R8.2 cw(c8.946,39.671) 7.575,39.671 ; U6.2 9.225,41.725 ; 7.575,39.671 U6.5 U6.6 8.575,41.075 ccw(c8.575,41.25) 8.75,41.25 cw(c9.225,41.25) 9.225,41.725
  Top Layer w0.254: v1(0.5,29.75) 0.5,29.25 ccw(c0.75,29.25) 0.75,29 2.855,29 cw(c2.855,28.405) 3.45,28.405 3.25,28.405 ; U1.8 U1.7 ; C5.1 3.25,28.405 ; U1.6 U1.7 ; 26.5,0.793 33.957,0.793 ; R3.2 34.146,5.646 ccw(c34.146,5.5) 34,5.5 34,0.836 cw(c33.957,0.836) 33.957,0.793 ; R7.1 34.646,33.646 ; U3.8 35.051,34.595 cw(c35.051,34.646) C12.1 ccw(c35,34.293) 34.646,34.293 34.646,33.646 ; U2.4 40.594,1.364 ccw(c41,1.364) C3.1 ; U5.VDD@41.05,31.475 41.05,32.35 ccw(c40.8,32.35) 40.8,32.6 38.4,32.6 cw(c38.4,33) 38,33 ccw(c37.354,33) 37.354,33.646 34.646,33.646 ; v1(42.75,1) cw(c42.707,1) 42.707,0.957 C3.1 ; U2.18 43.007,10.757 cw(c42,10.757) 42,9.75 41.25,9.75 ccw(c41.25,9.25) 40.75,9.25 40.75,8.5 ccw(c41,8.5) 41,8.25 cw(c41,7.75) 41.5,7.75 41.5,5.75 ccw(c41.75,5.75) 41.75,5.5 cw(c41.75,5.056) 42.194,5.056 U2.6 42.194,2.151 cw(c41,2.151) C3.1 ; 3.25,28.405 cw(c3.25,28.355) 3.3,28.355 U1.7 ; 33.957,0.793 cw(c34.121,0.793) 34.121,0.957 36.35,0.957 cw(c36.349,0.703) 36.396,0.953 ccw(c36.5,1.5) 36.502,0.943 39.841,0.956 C2.1 C3.1
  Top Layer w0.4: U4.8 U4.1 0.35,40.65 ; v1(0.5,29.75) cw(c0.5,29.9) 0.35,29.9 0.35,34.5 0.35,40.65 ; C1.1 cw(c4.15,40.85) 4.15,40.1 0.9,40.1 cw(c0.9,40.65) 0.35,40.65 ; 26.5,0.793 26.5,1 v1(26.5,28.5) ; v1(33,29.5) 33,32.5 cw(c33.5,32.5) 33.5,33 R7.1
  Bottom Layer w0.254: v1(42.75,1) 47.62,1 ccw(c47.62,1.38) JP1.1
  Bottom Layer w0.4: v1(0.5,29.75) ccw(c0.65,29.75) 0.65,29.6 26.5,29.6 ; v1(26.5,28.5) 26.5,29.6 ; v1(33,29.5) ccw(c32.9,29.5) 32.9,29.6 26.5,29.6
VIN: C6.2 L1.2 SW1.2 U4.5 | length 8.7
  Top Layer w0.5: U4.5 2.3,48 L1.2 ; L1.2@4.725,47.975 7.725,47.975 C6.2
  Top Layer w1: SW1.2 6.3,49.7 7.45,48.55 7.45,48.1 7.6,47.95 C6.2
pads on no net: AE1.2 P3.3 SW1. U1.5 U1.13 U1.14 U1.15 U1.16 U1.17 U1.18 U2.10 U2.19 U2.20 U2.22 U2.26 U3.3 U3.7 U4.2 U4.3 U4.4 U5.DIO2 U5.DIO5 U7.1 U7.7 U7.8 U7.12 U7.13 U7.15 U7.16 U7.18 U7.21 U7.22 U7.23 U7.24

## Polygon pours and split planes (outlines as drawn)
GND on Bottom Layer "BOT_GND" (solid, remove dead copper, pour order 3): 0,0 50,0 50,55 0,55
GND on Top Layer "TOP_GND" (solid, remove dead copper, pour order 2): 0,0 50,0 50,55 0,55

## Silkscreen, mask and mechanical layers (free items; w line width, h text height)
Top Overlay:
  lines w0.1: 0.1,49.2 2.8,49.2 2.8,46.6 2.8,40.9 ; 0.65,37.7 0.65,38.9 1.65,38.9 ; 0.7,9.6 0.7,8.9 1.7,8.9 ; 0.7,12.3 0.7,12.5 1.9,12.5 ; 1,32.3 1,33 2.2,33 ; 1.1,28.1 1.1,29 2.6,29 ; 1.9,31.7 1.9,31.1 3.2,31.1 ; 2.5,39.25 2.75,39.5 ; 2.7,10 3,10 3,11.4 2.7,11.4 ; 2.7,30.8 2.7,30 4.1,30 ; 3,29 4.5,29 4.5,28.75 4.5,28.05 ; 3.2,45.1 6.3,45.1 6.3,48.5 ; 3.3,33.5 3.3,34.8 4.1,34.8 ; 4,43.7 6,43.7 6,40.1 ; 4.75,39.5 5,39.25 ; 5.8,29.3 7.2,29.3 7.2,28.4 ; 6,38.85 6.75,38.85 6.75,37.45 ; 6.7,47.7 6.7,45.1 8.7,45.1 ; 7,35.25 10.5,35.25 10.5,35 ; 8,29 8,28 9.5,28 ; 8.6,37.2 8.6,36.5 9.9,36.5 ; 8.6,38 8.6,38.7 9.8,38.7 ; 8.9,48.7 8.9,47.4 8.9,45.1 10.9,45.1 ; 9.55,29.2 10.85,29.2 10.85,28.3 ; 9.75,36.25 10.25,35.5 11.25,35.5 11.75,36.25 ; 9.75,39 10.25,39.75 11.25,39.75 11.75,39 ; 10.1,13.4 9.9,13.4 9.9,12.3 10.2,12.3 ; 10.3,33.1 11.2,33.1 11.2,31.8 ; 10.5,34 10.5,34.25 ; 12,37.5 12.25,37.25 ; 12,37.75 12.25,38 ; 12.5,37.5 12.25,37.25 ; 12.5,37.75 12.25,38 ; 16.6,35.9 28.6,35.9 30.1,39.4 ; 26,23.75 26,28 ; 27,23.75 27,28 ; 34,5.4 34,6.8 34.8,6.8 ; 34.2,11.3 34.2,10.5 35.5,10.5 ; 34.2,11.7 34.2,12.5 35.5,12.5 ; 34.2,32.6 34.2,33.6 35.5,33.6 ; 34.3,34.4 34.3,35.9 35.3,35.9 ; 35,7 35.5,7 ; 35,8.5 35.5,8.5 ; 39.5,0.1 39.5,1.3 40.3,1.3 ; 40.6,1.3 41.5,1.3 41.5,0.1 ; 46.7,1.1 50,1.1 ; 47.5,36.2 47.5,36.8 47.6,36.8 ; 47.5,38.5 47.5,39.25 47.5,39.5 48.25,39.5 ; 48.5,37 48.5,38.5 ; 49,6.1 49,4.9 49.9,4.9 ; 49,6.6 49,7.9 49.9,7.9 ; 49.5,37 49.75,37 ; 49.5,38.5 49.75,38.5 ; 49.7,32.6 49.9,32.6 49.9,33.5 ; 49.7,33.5 49.9,33.5 ; 49.9,34.2 49.9,33.5 ; 12.25,37.25 12.25,38
  text "Solar PWR -" at 13.2,48.8 h0.8 r270
  text "Solar PWR +" at 30.2,48.8 h0.8 r270
  text "CL" at 10.33,38.58 h0.5
  text "DeSCENT CHIPSAT" at 16.7,38.5 h0.8
  text "I2C" at 10.33,37.33 h0.5
  text "Ver 1.90.1" at 21,36.9 h0.8
  text "DA" at 10.33,36.08 h0.5
Bottom Overlay:
  lines w0.1: 16.5,32.25 28,32.25 ; 16.5,33.75 28,33.75 ; 16.5,41.75 20.5,41.75 23.5,41.75 ; 16.5,43.25 20.5,43.25 23.5,43.25 ; 21,29.25 25,29.25 ; 21,30 25,30 ; 26,41.875 25.75,42.125 ; 26,42.375 25.75,42.125 ; 26.75,43.125 27,43.375 ; 27.25,43.125 27,43.375 ; 36.2,21.1 37.1,21.1 37.1,22.4 ; 40,0 40,20 41.7,21.7 49.2,21.7 50,21.7 ; 46.3,22.5 48,22.5 48,23.6 ; 25.75,42.125 27,42.125 27,43.375
  text "Board Size: W = 50" at 27.92,44.83 h0.5
  text "Board Size: H = 55" at 27.92,43.83 h0.5
  text "H" at 27.92,42.455 h0.5
  text "PT" at 23.42,42.33 h0.5
  text "W" at 26.67,41.08 h0.5
  text "ATMEGA328P-AU" at 23.42,40.33 h0.5
  text "Solar PWR +" at 13.2,40.2 h0.8 r270
  text "Solar PWR -" at 30.2,40.2 h0.8 r270
  text "W25Q16JVSNIQ" at 23.42,39.33 h0.5
  text "BME280" at 23.42,38.33 h0.5
  text "BNO085" at 23.42,37.33 h0.5
  text "L6920D (OBS)" at 23.42,36.33 h0.5
  text "MAX-M10S-00B" at 23.42,35.33 h0.5
  text "RFM69HCW" at 23.42,34.33 h0.5
  text "Equal RF Traces Ver" at 27.42,32.772 h0.5
  text "L" at 36.8,27.2 h0.8
  text "O" at 41.8,27.2 h0.8
  text "S" at 47.8,27.2 h0.8
  text "GND" at 49.72,22.88 h0.5
  text "50" at 38.72,20.88 h0.5
  text "GND" at 46.05,18.7 h0.8
  text "SCK" at 46.05,16.164 h0.8
  text "MISO" at 46.05,13.629 h0.8
  text "MOSI" at 46.05,11.093 h0.8
  text "RST" at 46.05,8.557 h0.8
  text "RX" at 46.05,6.021 h0.8
  text "TX" at 46.05,3.486 h0.8
  text "VCC" at 46.05,0.95 h0.8

## Text inside footprints (layer, text, board x,y; h text height)
PS1: Top Overlay "Glue Here" at 28.772,4.364 h1.52 r180
PS2: Bottom Overlay "Glue Here" at 16.126,4.364 h1.52 r180
U3: Top Overlay "*" at 42.296,34.163 h0.5 r180
U5: Top Overlay "+" at 41.784,28.699 h0.5 r90; Top Overlay "A" at 49.553,29.029 h0.5 r90; Top Overlay "-" at 47.689,28.763 h0.5 r90; Top Overlay "-" at 49.683,16.877 h0.5 r90; Top Overlay "-" at 35.649,16.865 h0.5 r90
U7: Top Overlay "*" at 4.9,35.2 h0.5